# Altium PCB RGB-mic.PcbDoc
Units mm, origin at the board's own origin, x right, y up, seen from the top; angles counter-clockwise.
Board outline 151 x 86.38 mm, 2 copper layers (Top Layer, Bottom Layer); 14 components, 8 nets, 37 pads, 0 vias.
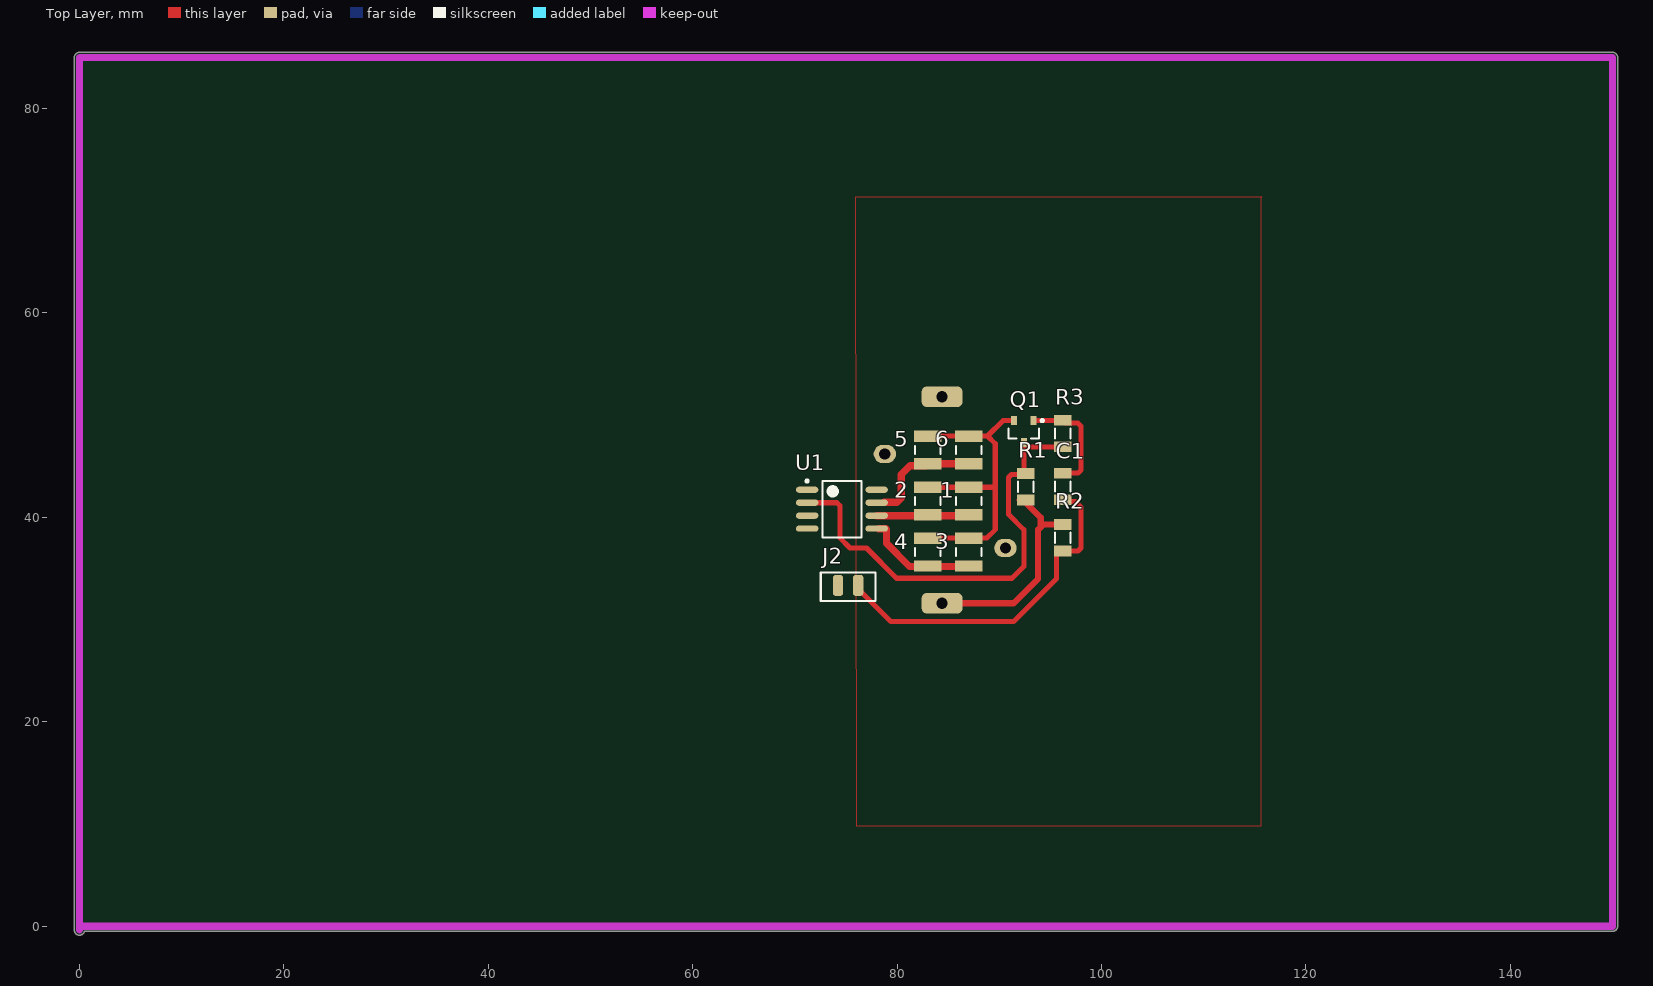
[diagram p0: Top Layer view]
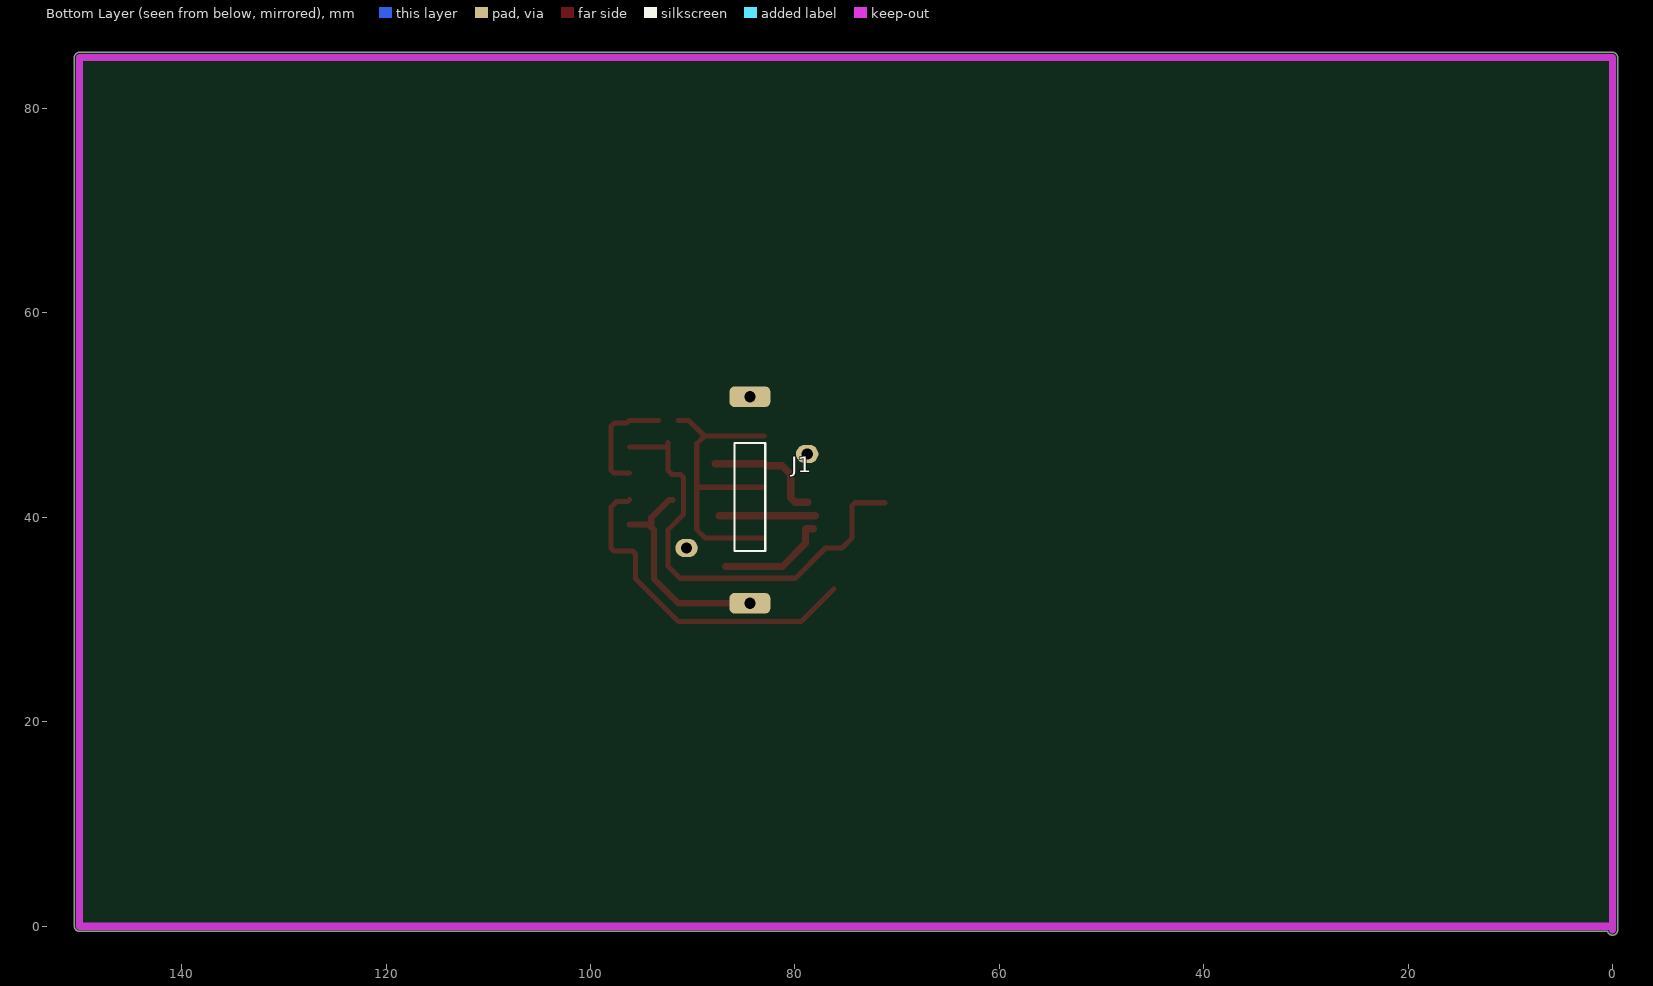
[diagram p1: Bottom Layer view, seen from below]
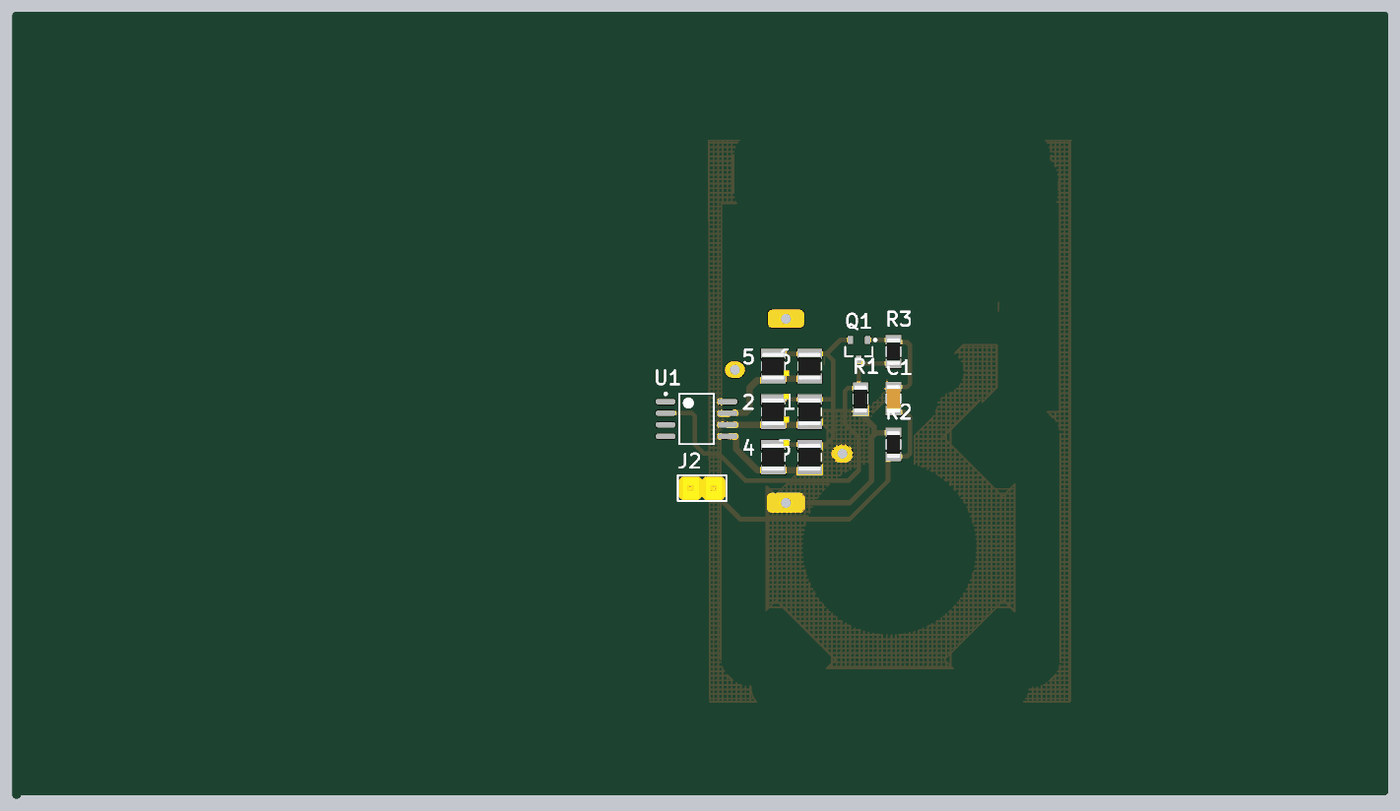
[diagram p2: 3D render of the assembled board from above, using the file's embedded part models]

## Layer stack, top to bottom
Top Solder: solder mask 0.0102, Solder Resist, Dk 3.5
Top Layer: signal copper 0.0356
Dielectric 1: dielectric 0.32, FR-4, Dk 4.8
Bottom Layer: signal copper 0.0356
Bottom Solder: solder mask 0.0102, Solder Resist, Dk 3.5

## Board outline
-0.5,-0.381 -0.5,85 cw(c0,85) 0,85.5 150,85.5 cw(c150,85) 150.5,85 150.5,0 cw(c150,0) 150,-0.5 0.486,-0.5 cw(c0,-0.381)

## Design rules (kind name [scope] priority, off if disabled: settings)
Clearance Clearance_1 [InPolygon] p1: gap=1 ignorepadtopadclearanceinfootprint=FALSE
Clearance [All] p2: gap=0.4 ignorepadtopadclearanceinfootprint=FALSE
PolygonConnect [All] p1: connectstyle=Relief reliefconductorwidth=0.254 reliefentries=4 polygonreliefangle="90 Angle" airgapwidth=0.254
RoomDefinition RGB-mic [InComponentClass('RGB-mic')] p1: confinementstyle=ConfineIn formatcopy=TRUE lockcomponents=FALSE outline 151.564,0.523 157.564,0.523 157.564,12.323 151.564,12.323
RoutingLayers [All] p1: top layer_v5=FALSE bottom layer_v5=TRUE
RoutingVias [All] p1: holewidth=0.711 width=2.5 viastyle="Through Hole" minholewidth=0.711 minwidth=1.27 maxholewidth=0.711 maxwidth=2
SolderMaskExpansion [All] p1: expansion=0.102 istentingtop=FALSE
SupplyNets "Schematic Supply Nets" [InNet('GND')] p1: voltage=0.000
Width [All] p1: maxlimit=3 minlimit=0.4 preferedwidth=1
29 further rules are at their usual default settings.

## Components (designator, comment, footprint, x,y, rotation, side; value= is the part's Value field where it differs from the comment)
1 "LED2" "RES 1210 (3226X07L)" 87,41.6 r90 top
2 "LED2" "RES 1210 (3226X07L)" 83,41.6 r90 top
3 "LED2" "RES 1210 (3226X07L)" 87,36.6 r90 top
4 "LED2" "RES 1210 (3226X07L)" 83,36.6 r90 top
5 "LED2" "RES 1210 (3226X07L)" 83,46.6 r90 top
6 "LED2" "RES 1210 (3226X07L)" 87,46.6 r90 top
C1 "=Value" "CAP 1206" 96.2,43 r90 top
J1 "Header4X1" "HEADER 4X1" 84.4,38.12 r90 bottom
J2 "Header2X1" "Header 2X1" 75.2,33.2 r0 top
Q1 "QNPN" SOT-23B_L 92.4,48.4 r270 top
R1 "10K" "RES 1206 (3216X08L)" 92.6,43 r270 top
R2 "10K" "RES 1206 (3216X08L)" 96.2,38 r90 top
R3 "10K" "RES 1206 (3216X08L)" 96.2,48.2 r270 top
U1 "ATtiny15L-1SC" 8S2_N 74.6,40.8 r0 top

## Footprints (in the part's own frame and the unit in brackets; to place one, negate y for a bottom-side part, rotate by r counter-clockwise, add the part's x,y. Pads: shape width x height; smd on the part's side, far side on the other; paste and mask are expansions set on the pad)
8S2_N [mm] "SOP, 8-Leads, Body 5.3x5.3mm, Pitch 1.27mm, IPC Medium Density"
  oval 2.2x0.6 smd: 1(-3.4,1.905) 2(-3.4,0.635) 3(-3.4,-0.635) 4(-3.4,-1.905) 5(3.4,-1.905) 6(3.4,-0.635) 7(3.4,0.635) 8(3.4,1.905)
  silkscreen extent -3.52,-2.75 1.9,2.88, body extent -2.73,-2.75 2.73,2.75, height 2.16
"CAP 1206" [mm]
  rect 1.05x1.7 smd: 1(-1.27,0) 2(1.326,0)
  silkscreen extent -0.47,-0.75 0.53,0.75, body extent -1.49,-0.77 1.55,0.75, height 0.75
"Header 2X1" [mm]
  rrect50% 1x2.032 smd: 1(-0.99,0.141) 2(0.99,0.141)
  silkscreen extent -2.67,-1.4 2.67,1.4, body extent -2.54,-1.27 2.54,1.27, height 9.5
"HEADER 4X1" [mm]
  rrect50% 2x4 hole 1.1: 1(-6.52,0) 4(13.68,0)
  oval 1.8x2.2 hole 1.1: 2(-1.12,6.2) 3(8.08,-5.6)
  silkscreen extent -1.43,-1.5 9.18,1.5, body extent -1.19,-1.22 8.97,1.32, height 8.38
"RES 1206 (3216X08L)" [mm] "Chip Resistor, 2-Leads, Body 3.2x1.6mm, IPC High Density _ (0.125 W)"
  rect 1.05x1.7 smd: 1(-1.295,0) 2(1.301,0)
  silkscreen extent -0.5,-0.75 0.5,0.75, body extent -1.52,-0.76 1.53,0.76, height 0.6
"RES 1210 (3226X07L)" [mm] "Chip Resistor, 2-Leads, Body 3.2x2.6mm, IPC High Density _ (0.250 W)"
  rect 1.1x2.7 smd: 1(-1.35,0) 2(1.35,0)
  silkscreen extent -0.4,-1.25 0.4,1.25, body extent -1.52,-1.27 1.52,1.27, height 0.6
SOT-23B_L [mm] "SOT23, 3-Leads, Body 2.9x1.3mm, Pitch 0.95mm, Lead Span 2.4mm, IPC High Density"
  rect 0.85x0.6 smd: 1(-1.075,0.95) 2(-1.075,-0.95) 3(1.075,0)
  silkscreen extent -1.2,-1.5 0.7,1.93, body extent -0.7,-1.5 0.7,1.5, height 1.14

## Part data
1 2 3 4 5 6: "Typical RED, GREEN, YELLOW, AMBER GaAs LED", LatestRevisionDate=17-Jul-2002, LatestRevisionNote="Re-released for DXP Platform.", PackageDescription="SM LED; 2 Flat Leads", PackageReference=3.2X1.6X1.1, PackageVersion=Feb-2002, Published=8-Jun-2000, Publisher="Altium Limited"
C1: library part Capacitor, "Capacitor"
Q1: "NPN Bipolar Transistor", LatestRevisionDate=29-May-2009, LatestRevisionNote="IPC-7351 Footprint Added.", PackageDescription="3-Pin SOT-23 Package 0.95 mm Pitch, 2.4 mm Lead Span", PackageReference=SOT-23B, PackageVersion=Aug-1999, Published=8-Jun-2000, Publisher="Altium Limited"
R1 R2 R3: library part Resistor, "Resistor", Power="1/4 W", Tolerance=5%
U1: "8-Bit AVR Microcontroller with 1K Byte of Flash Memory", Supplier Part Number 1=ATTINY15L-1SC-ND, ComponentLink1Description=Datasheet, ComponentLink1URL=http://www.atmel.com/dyn/resources/prod_documents/doc1187.pdf, ComponentLink2Description="Atmel.com Home", ComponentLink2URL=http://www.atmel.com, DatasheetVersion=1187E-AVR-06/02, LatestRevisionDate=16-Oct-2006, LatestRevisionNote="IPC-7351 Footprint Added.", PackageDescription="8-Lead, 0.208\" Body, Plastic Small Outline Package (EIAJ)", PackageReference=8S2, PackageVersion="revF, Apr-2008", Published=17-Sep-2003, Publisher="Altium Limited", Supplier 1=Digi-Key, Supplier 2=Mouser, Supplier Part Number 2=556-ATTINY15L1SC

## Nets (pads, with @x,y where several pads share a name; then routed paths per layer and width w, separated by ;. In a path a pad name is that pad's centre, name@x,y a point inside that pad or via, vN(x,y) a via of type N, cw(c..) or ccw(c..) an arc to the next point about the centre after c; other vN are vias at no path point)
B: 5.1 6.1 U1.7 | length 12
  Top Layer w0.7: U1.7@78.75,41.485 79.99,41.485 80.4,41.895 80.4,44.2 81.25,45.05 82.8,45.05 5.1 6.1 6.1@87.8,45.25
G: 1.1 2.1 U1.6 | length 9.4
  Top Layer w0.7: U1.6 1.1@87.4,40.165
GND: 1.2 2.2 3.2 4.2 5.2 6.2 J1.2 J1.3 J2.1 Q1.2 U1.8 | length 32.1
  Top Layer w0.5: 4.2 83.05,38 88.8,38 89.6,38.8 89.6,43 ; 2.2 1.2 89.55,42.95 89.6,43 ; 5.2 6.2 88.85,47.95 ; Q1.2 90.375,49.475 88.85,47.95 ; 88.85,47.95 89.6,47.2 89.6,43
in: Q1.3 R1.1 R3.2 U1.2 | length 44.3
  Top Layer w0.5: U1.2 74.107,41.435 74.4,41.142 74.4,38 75.4,37 77,37 79.95,34.05 91.25,34.05 92.4,35.2 92.4,38.8 90.893,40.307 90.893,43.907 91.186,44.2 92.03,44.2 92.4,44.57 92.4,46.8 ; Q1.3 92.4,46.8 ; R3.2 92.499,46.899 92.4,46.8
NetC1_1: C1.1 J2.2 R2.1 | length 33.6
  Top Layer w0.5: J2.2@76.2,33 79.4,29.8 91.4,29.8 95.6,34 95.6,36.43 95.875,36.705 97.707,36.705 98,36.997 98,41 97.453,41.547 96.383,41.547 C1.1
NetC1_2: C1.2 Q1.1 R3.1 | length 11.1
  Top Layer w0.5: Q1.1 93.36,49.485 96.19,49.485 R3.1 96.475,49.22 97.707,49.22 98,48.928 98,44.619 97.707,44.326 C1.2
R: 3.1 4.1 U1.5 | length 10.9
  Top Layer w0.7: U1.5@78.2,38.895 78.9,38.895 78.95,38.845 78.95,37.476 81.226,35.2 3.1@86.8,35.2
vcc: J1.1 J1.4 R1.2 R2.2 U1.1 | length 21.5
  Top Layer w0.6: J1.1 91.4,31.6 93.8,34 93.8,38.8 94.05,39.05 ; R1.2@92,41.699 92.325,41.699 94.05,39.974 94.05,39.301 94.05,39.05 ; R2.2 94.301,39.301 94.05,39.05
pads on no net: U1.3 U1.4

## Polygon pours and split planes (outlines as drawn)
GND on Top Layer "NONET_L01_P024" (hatched 90Degree grid 0.5 track 0.2, shelved, pour order 24): 75.946,71.374 115.697,71.374 115.57,71.247 115.57,9.779 76.073,9.779

## Keep-outs
Keep-Out Layer:
  lines w0.7: 0,-0.381 0,85 150,85 150,0 0,0